# Altium PCB STM32.PcbDoc (part 3 of 10)
Units mil, origin at the board's own origin, x right, y up, seen from the top; angles counter-clockwise.
Board outline 3925 x 3925 mil, 2 copper layers (Top Layer, Bottom Layer); 152 components, 142 nets, 670 pads, 189 vias.
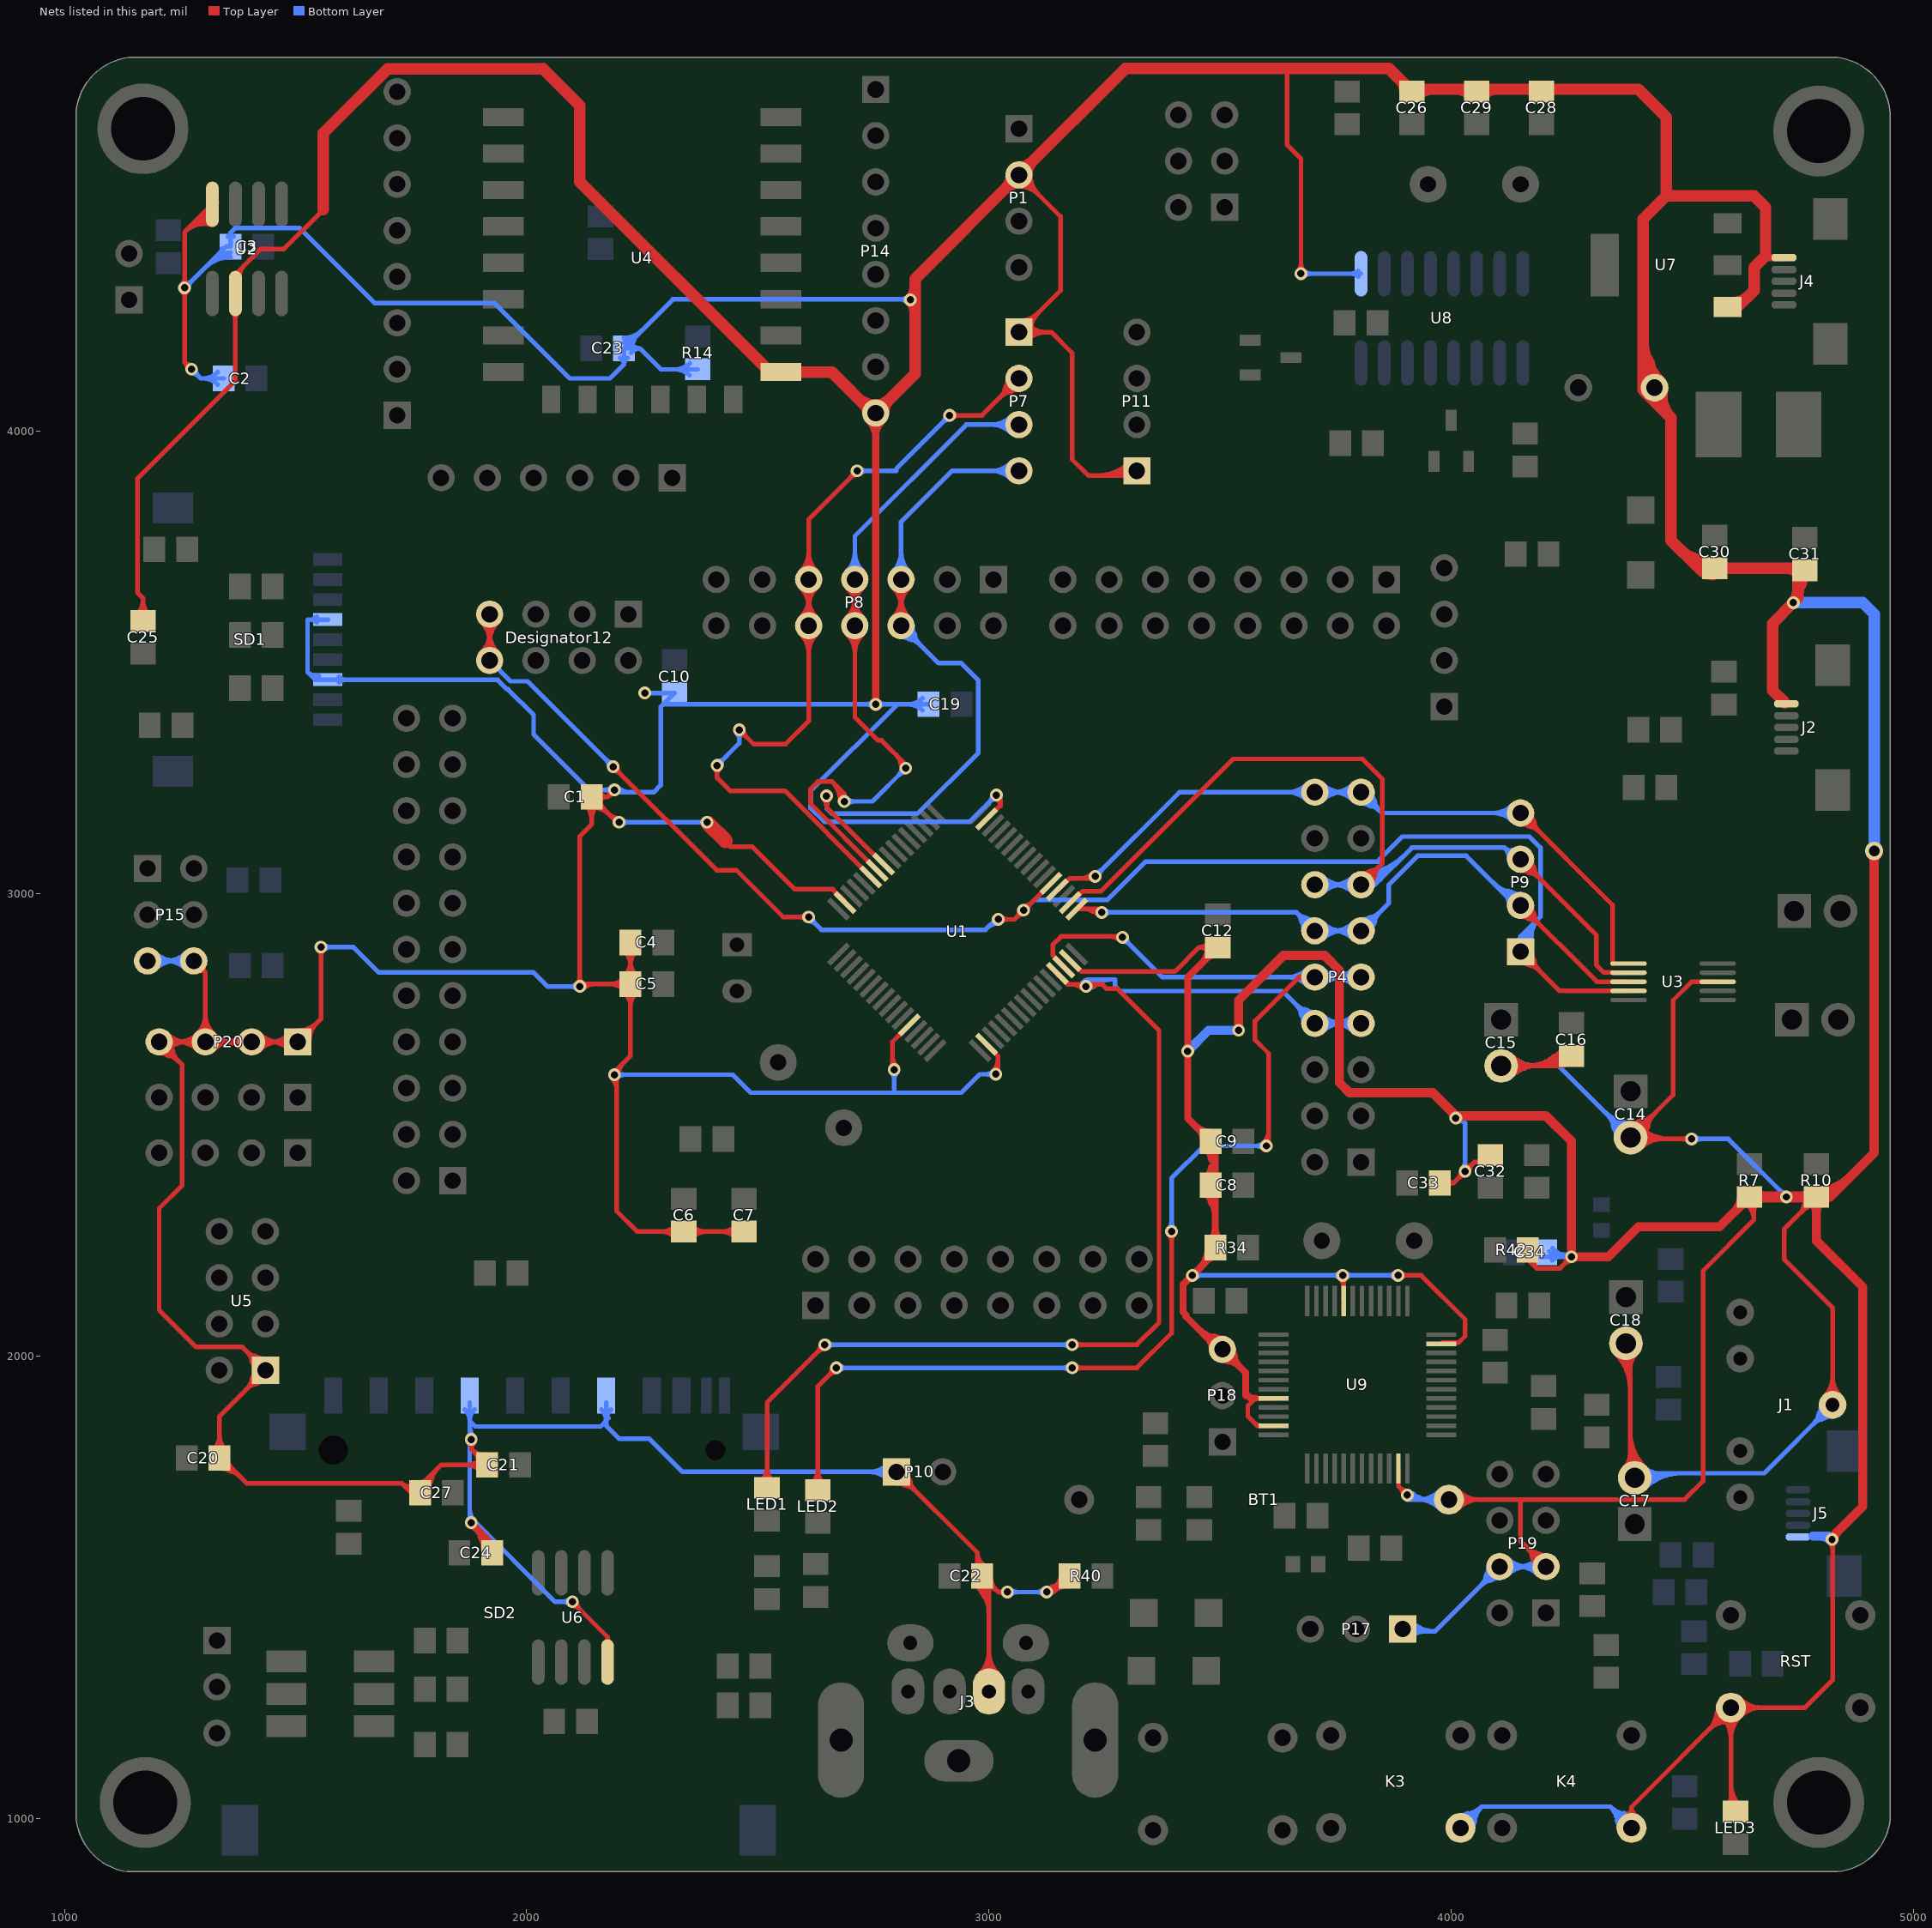
[diagram p3: the nets of this part, all layers, seen from the top]

## Via types
v1: diameter 27.56, hole 15.75, Top Layer to Bottom Layer, tented both sides, 185 vias
v2: diameter 39.37, hole 23.62, Top Layer to Bottom Layer, tented both sides, 3 vias
v3: diameter 39.37, hole 27.56, Top Layer to Bottom Layer, tented both sides, 1 vias

## Nets (pads, with @x,y where several pads share a name; then routed paths per layer and width w, separated by ;. In a path a pad name is that pad's centre, name@x,y a point inside that pad or via, vN(x,y) a via of type N, cw(c..) or ccw(c..) an arc to the next point about the centre after c; other vN are vias at no path point) (continued)
GND: (continued)
  Bottom Layer w10: P15.5@1180,2855 P15.6@1280,2855 ; v1@1260,4319.89 ccw(c1260,4343.78) 1276.89,4326.89 ; v1@1260.56,4310.56 1350,4400 C3.1@1359.57,4400 1359.57,4430.14 ; v1@1268.78,4311.11 cw(c1287.29,4311.11) 1274.2,4324.2 ; v1@1275,4126.22 cw(c1275,4105.02) 1289.99,4120.01 cw(c1304.98,4135) v1@1283.78,4135 ; v1(1275,4135) 1295,4115 C2.2@1344.57,4115 ; 1304.72,4354.72 cw(c1359.57,4299.88) C3.1@1359.57,4377.44 ; 1321.79,4371.79 cw(c1359.57,4334.02) C3.1@1359.57,4387.44 ; C3.1@1337.33,4387.33 ccw(c1328.59,4396.06) C3.1@1340.95,4396.06 ; 1535.65,3473.51 cw(c1533.15,3447.62) SD1.6@1553.23,3464.16 ; v1(1555,2885) 1625,2885 1680,2830 2015,2830 2045,2800 v1(2115,2800) ; v1@1561.21,2878.79 cw(c1576.2,2863.8) 1576.2,2885 cw(c1576.2,2906.2) v1@1561.21,2891.21 ; SD1.3@1570,3593.31 1526,3593.31 1526,3480 ; SD2.3@1876.85,1900 1876.85,1860 ; v1@1878.94,1639.4 ccw(c1901.16,1652) 1894.55,1627.32 ; v1(2099,1469) 2061.63,1469 1876.85,1653.78 1876.85,1860 ; v1@2108.79,2793.79 ccw(c2093.8,2778.8) 2093.8,2800 ccw(c2093.8,2821.2) v1@2108.79,2806.21 ; SD2.6@2172.13,1900 2172.13,1860 ; 2176.73,1866.37 ccw(c2178.83,1860) 2172.13,1860 ; v1@2183.79,3218.79 ccw(c2168.8,3203.8) 2168.8,3225 ccw(c2168.8,3246.2) v1@2183.79,3231.21 ; v1(2190,2609) 2446,2609 2485,2570 2795,2570 ; v1@2190,3220 2275,3220 2290,3235 2290,3404.57 2295.43,3410 ; v1(2190,3225) 2135,3225 2015,3345 2015,3387.14 1959.62,3442.52 1957.76,3442.52 1937.29,3462.99 1902.6,3462.99 1902.21,3463.39 SD1.6@1570,3463.39 1542.61,3463.39 1526,3480 ; v1@2196.21,2602.79 cw(c2211.2,2587.8) 2211.2,2609 cw(c2211.2,2630.2) v1@2196.21,2615.21 ; v1@2196.21,3231.21 ccw(c2223.27,3258.27) 2223.27,3220 ; v1(2200,3155) v1(2390,3155) ; v1@2206.21,3148.79 cw(c2221.2,3133.8) 2221.2,3155 cw(c2221.2,3176.2) v1@2206.21,3161.21 ; C23.2@2210.43,4192.56 ccw(c2210.43,4222.88) C23.2@2231.87,4201.44 ; C23.2@2210.43,4202.56 ccw(c2210.43,4257.02) 2248.94,4218.51 ; C23.2@2225.99,4169.76 cw(c2245,4157.23) 2245,4180 ; C23.2@2225.99,4190.24 ccw(c2245,4202.77) 2245,4180 ; C23.2@2229.06,4183.94 cw(c2264.51,4183.94) 2239.44,4209.01 ; v1(2255.43,3434.57) C10.2@2320,3434.57 2295.43,3410 ; R14.1@2352.9,4121.4 ccw(c2321.11,4089.61) 2321.11,4134.57 ccw(c2321.11,4179.53) R14.1@2352.9,4147.74 ; R14.1@2370,4134.57 2290.43,4134.57 2245,4180 ; v1@2748.79,3403.79 ccw(c2733.8,3388.81) 2733.8,3410 ccw(c2733.8,3431.2) v1@2748.79,3416.21 ; v1@2761.21,3403.79 cw(c2776.2,3388.81) 2776.2,3410 cw(c2776.2,3431.2) v1@2761.21,3416.21 ; v1@2788.79,2613.79 cw(c2773.8,2598.8) 2795,2598.8 cw(c2816.2,2598.8) v1@2801.21,2613.79 ; v1(2795,2620) 2795,2570 ; P10.1@2800,1750 2337,1750 2265,1822 2200,1822 2172.13,1849.87 2172.13,1860 ; 2806.39,4286 cw(c2806.39,4261.39) v1@2823.79,4278.79 ; 2811.22,4286 ccw(c2811.22,4303.78) v1@2823.79,4291.21 ; v1@2820,4286 2316.43,4286 C23.2@2210.43,4180 ; C19.2@2856.4,3396.83 ccw(c2824.61,3365.04) 2824.61,3410 ccw(c2824.61,3454.96) C19.2@2856.4,3423.17 ; C19.2@2869.57,3410 2801.74,3410 ; v1@3007.22,3214 cw(c2986.02,3214) 3001.01,3199.01 cw(c3016,3184.02) v1@3016,3205.22 ; v1@3008.79,2603.79 ccw(c2993.8,2588.8) 2993.8,2610 ccw(c2993.8,2631.2) v1@3008.79,2616.21 ; v1(3015,2610) 2980,2610 2940,2570 2795,2570 ; v1(3016,3214) 2958,3156 2643.74,3156 2613.74,3186 2613.74,3222 2801.74,3410 ; v1@3045,1490 v1(3125,1490) ; v1(3440,2175) v1@3755,2175 ; v1(3675,4341.46) U8.1@3805,4341.46 ; v1@3681.21,4335.25 cw(c3696.2,4320.26) 3696.2,4341.46 cw(c3696.2,4362.65) v1@3681.21,4347.66 ; v1(3765.29,2175) v1(3885,2175) ; U8.1@3798.79,4335.25 ccw(c3783.8,4320.26) 3783.8,4341.46 ccw(c3783.8,4362.65) U8.1@3798.79,4347.66 ; P17.1@3895,1410 3900,1405 3965,1405 ; v1@3904.26,1700.97 cw(c3912.17,1690.53) 3918.72,1701.87 ; v1@3905,1690 BT1.2@3995,1690 ; v1@3910.3,1693 cw(c3922.04,1677.48) 3931.77,1694.33 ; K3.1@4007.87,982.89 cw(c4045.54,973.91) 4036.09,1011.47 ; v1@4015,2520 4030,2505 ; K3.1@4017.59,980.57 cw(c4063.64,969.59) 4052.09,1015.49 ; K3.1@4020,980 4066,1026 ; K3.1@4020.57,977.59 ccw(c4009.59,1023.64) 4055.49,1012.09 ; K3.1@4022.89,967.87 ccw(c4013.91,1005.54) 4051.47,996.09 ; v1(4030,2400) 4030,2505 ; 4074.48,1522.65 cw(c4111.61,1512.7) P19.4@4103.9,1550.36 ; 4082.65,1514.48 ccw(c4072.7,1551.61) P19.4@4110.36,1543.9 ; C15.2@4108,2628 4233,2628 C14.2@4388,2473 ; C34.1@4190.87,2215 v1(4260,2215) ; P19.3@4205,1545 P19.4@4105,1545 3965,1405 ; 4345.38,2514.8 ccw(c4399.53,2529.31) C14.2@4388.28,2474.39 ; 4346.2,2515.62 cw(c4331.69,2461.47) C14.2@4386.61,2472.72 ; 4349.57,2499.17 ccw(c4395.9,2511.58) C14.2@4386.28,2464.59 ; 4354.51,1012.09 ccw(c4400.41,1023.64) K4.1@4389.43,977.59 ; 4357.92,1015.49 cw(c4346.36,969.59) K4.1@4392.41,980.57 ; C14.2@4358.04,2482.46 ccw(c4332.37,2490.56) 4351.44,2509.56 ; C14.2@4358.06,2482.51 ccw(c4332.55,2490.61) 4351.44,2509.56 ; 4358.53,996.09 ccw(c4396.1,1005.54) K4.1@4387.11,967.87 ; 4361.83,2511.43 cw(c4349.42,2465.1) C14.2@4396.41,2474.72 ; 4373.91,1011.47 cw(c4364.46,973.91) K4.1@4402.13,982.89 ; C14.2@4378.49,2502.94 cw(c4370.39,2528.45) 4351.44,2509.56 ; C14.2@4378.54,2502.96 cw(c4370.44,2528.63) 4351.44,2509.56 ; K4.1@4390,980 4344,1026 ; C17.2@4410,1747 4677,1747 J1.1@4825,1895 ; v1(4520,2470) 4599.57,2470 v1(4725,2344.57) ; 4793.65,1871.32 cw(c4831.95,1861.06) J1.1@4824,1899.9 ; 4801.32,1863.66 ccw(c4791.06,1901.95) J1.1@4829.9,1894 ; 1215.07,2855 ccw(c1215.07,2819.93) 1190.27,2844.73 cw(c1215.07,2819.93) 1215.07,2855 ; 1215.07,2855 cw(c1215.07,2890.07) 1190.27,2865.27 ccw(c1215.07,2890.07) 1215.07,2855 ; 1220.79,2855 ccw(c1220.79,2914.21) 1262.66,2872.34 cw(c1220.79,2914.21) 1220.79,2855 ; 1220.79,2855 cw(c1220.79,2795.78) 1262.66,2837.65 ccw(c1220.79,2795.78) 1220.79,2855 ; 1239.21,2855 ccw(c1239.21,2795.78) 1197.34,2837.65 cw(c1239.21,2795.78) 1239.21,2855 ; 1239.21,2855 cw(c1239.21,2914.21) 1197.34,2872.34 ccw(c1239.21,2914.21) 1239.21,2855 ; 1244.93,2855 ccw(c1244.93,2890.07) 1269.73,2865.27 cw(c1244.93,2890.07) 1244.93,2855 ; 1244.93,2855 cw(c1244.93,2819.93) 1269.73,2844.73 ccw(c1244.93,2819.93) 1244.93,2855 ; 1299.61,4115 ccw(c1299.61,4159.96) 1331.4,4128.17 cw(c1299.61,4159.96) 1299.61,4115 ; 1299.61,4115 cw(c1299.61,4070.04) 1331.4,4101.83 ccw(c1299.61,4070.04) 1299.61,4115 ; 1359.57,4430.13 ccw(c1368.68,4430.13) 1365.69,4421.52 cw(c1368.68,4430.13) 1359.57,4430.13 ; 1359.57,4430.13 cw(c1350.45,4430.13) 1353.45,4421.52 ccw(c1350.45,4430.13) 1359.57,4430.13 ; 1359.57,4430.14 1370,4440.57 1508.43,4440.57 1671,4278 1930,4278 2093,4115 2180,4115 2210.43,4145.43 ; 1526,3480 ccw(c1546.14,3500.14) 1550.84,3472.05 cw(c1546.14,3500.14) 1526,3480 ; 1531.09,3593.31 ccw(c1531.09,3614.5) 1546.08,3599.52 cw(c1531.09,3614.5) 1531.09,3593.31 ; 1531.09,3593.31 cw(c1531.09,3572.11) 1546.08,3587.1 ccw(c1531.09,3572.11) 1531.09,3593.31 ; 1608.91,3463.39 ccw(c1608.91,3442.19) 1593.92,3457.18 cw(c1608.91,3442.19) 1608.91,3463.39 ; 1608.91,3463.39 cw(c1608.91,3484.58) 1593.92,3469.59 ccw(c1608.91,3484.58) 1608.91,3463.39 ; 1876.85,1860 ccw(c1841.73,1860) 1866.5,1884.9 cw(c1841.73,1860) 1876.85,1860 ; 1876.85,1860 cw(c1911.97,1860) 1887.2,1884.9 ccw(c1911.97,1860) 1876.85,1860 ; 1876.85,1860 1888.7,1848.15 2160.27,1848.15 2172.13,1860 ; 2077.8,1469 ccw(c2077.8,1490.2) 2092.79,1475.21 cw(c2077.8,1490.2) 2077.8,1469 ; 2077.8,1469 cw(c2077.8,1447.8) 2092.79,1462.79 ccw(c2077.8,1447.8) 2077.8,1469 ; 2172.13,1860 ccw(c2137.01,1860) 2161.77,1884.9 cw(c2137.01,1860) 2172.13,1860 ; 2172.13,1860 cw(c2207.24,1860) 2182.48,1884.9 ccw(c2207.24,1860) 2172.13,1860 ; 2210.43,4145.44 ccw(c2194.56,4145.44) 2201.86,4159.53 cw(c2194.56,4145.44) 2210.43,4145.44 ; 2210.43,4145.44 cw(c2226.31,4145.44) 2219,4159.53 ccw(c2226.31,4145.44) 2210.43,4145.44 ; 2210.43,4145.43 C23.2@2210.43,4180 ; C23.2@2210.43,4180 2245,4180 ; 2295.43,3410 v1(2755,3410) 2801.74,3410 ; 2740.79,1750 ccw(c2740.79,1809.21) 2782.66,1767.34 cw(c2740.79,1809.21) 2740.79,1750 ; 2740.79,1750 cw(c2740.79,1690.79) 2782.66,1732.66 ccw(c2740.79,1690.79) 2740.79,1750 ; 2764.93,1750 ccw(c2764.93,1785.07) 2789.73,1760.27 cw(c2764.93,1785.07) 2764.93,1750 ; 2764.93,1750 cw(c2764.93,1714.93) 2789.73,1739.73 ccw(c2764.93,1714.93) 2764.93,1750 ; 3061.2,1490 ccw(c3061.2,1468.8) 3046.21,1483.79 cw(c3061.2,1468.8) 3061.2,1490 ; 3061.2,1490 cw(c3061.2,1511.2) 3046.21,1496.21 ccw(c3061.2,1511.2) 3061.2,1490 ; 3103.8,1490 ccw(c3103.8,1511.2) 3118.79,1496.21 cw(c3103.8,1511.2) 3103.8,1490 ; 3103.8,1490 cw(c3103.8,1468.8) 3118.79,1483.79 ccw(c3103.8,1468.8) 3103.8,1490 ; 3461.2,2175 ccw(c3461.2,2153.8) 3446.21,2168.79 cw(c3461.2,2153.8) 3461.2,2175 ; 3461.2,2175 cw(c3461.2,2196.2) 3446.21,2181.21 ccw(c3461.2,2196.2) 3461.2,2175 ; 3744.1,2175 ccw(c3744.1,2196.2) 3759.08,2181.21 cw(c3744.1,2196.2) 3744.1,2175 ; 3744.1,2175 cw(c3744.1,2153.8) 3759.08,2168.79 ccw(c3744.1,2153.8) 3744.1,2175 ; 3786.49,2175 ccw(c3786.49,2153.8) 3771.5,2168.79 cw(c3786.49,2153.8) 3786.49,2175 ; 3786.49,2175 cw(c3786.49,2196.2) 3771.5,2181.21 ccw(c3786.49,2196.2) 3786.49,2175 ; 3863.8,2175 ccw(c3863.8,2196.2) 3878.79,2181.21 cw(c3863.8,2196.2) 3863.8,2175 ; 3863.8,2175 cw(c3863.8,2153.8) 3878.79,2168.79 ccw(c3863.8,2153.8) 3863.8,2175 ; 3928.54,1690 ccw(c3928.54,1756.46) 3975.54,1709.46 cw(c3928.54,1756.46) 3928.54,1690 ; 3928.54,1690 cw(c3928.54,1623.54) 3975.54,1670.54 ccw(c3928.54,1623.54) 3928.54,1690 ; 3952.68,1690 ccw(c3952.68,1732.32) 3982.61,1702.39 cw(c3952.68,1732.32) 3952.68,1690 ; 3952.68,1690 cw(c3952.68,1647.68) 3982.61,1677.61 ccw(c3952.68,1647.68) 3952.68,1690 ; 3965,1405 cw(c3965,1478.2) 3912.57,1427.12 ccw(c3965,1478.2) 3965,1405 ; 4030,2421.2 ccw(c4051.2,2421.2) 4036.21,2406.21 cw(c4051.2,2421.2) 4030,2421.2 ; 4030,2421.2 cw(c4008.8,2421.2) 4023.79,2406.21 ccw(c4008.8,2421.2) 4030,2421.2 ; 4030,2505 ccw(c4020.57,2495.57) 4014.19,2507.29 cw(c4020.57,2495.57) 4030,2505 ; 4049.29,1009.29 ccw(c4077.7,980.88) 4037.53,980.27 cw(c4077.7,980.88) 4049.29,1009.29 ; 4049.29,1009.29 cw(c4020.88,1037.7) 4020.27,997.53 ccw(c4020.88,1037.7) 4049.29,1009.29 ; 4063.13,1503.13 ccw(c4021.26,1545) 4080.47,1545 cw(c4021.26,1545) 4063.13,1503.13 ; 4063.13,1503.13 cw(c4105,1461.26) 4105,1520.47 ccw(c4105,1461.26) 4063.13,1503.13 ; 4066,1026 ccw(c4110.62,981.38) 4047.52,980.42 cw(c4110.62,981.38) 4066,1026 ; 4066,1026 cw(c4021.38,1070.62) 4020.42,1007.52 ccw(c4021.38,1070.62) 4066,1026 ; 4066,1026 4344,1026 ; 4080.2,1520.2 ccw(c4055.4,1545) 4090.47,1545 cw(c4055.4,1545) 4080.2,1520.2 ; 4080.2,1520.2 cw(c4105,1495.4) 4105,1530.47 ccw(c4105,1495.4) 4080.2,1520.2 ; 4140.07,1545 ccw(c4140.07,1509.93) 4115.27,1534.73 cw(c4140.07,1509.93) 4140.07,1545 ; 4140.07,1545 cw(c4140.07,1580.07) 4115.27,1555.27 ccw(c4140.07,1580.07) 4140.07,1545 ; 4145.79,1545 ccw(c4145.79,1604.21) 4187.66,1562.34 cw(c4145.79,1604.21) 4145.79,1545 ; 4145.79,1545 cw(c4145.79,1485.79) 4187.66,1527.66 ccw(c4145.79,1485.79) 4145.79,1545 ; 4159.71,2628 ccw(c4159.71,2576.29) 4123.14,2612.86 cw(c4159.71,2576.29) 4159.71,2628 ; 4159.71,2628 cw(c4159.71,2679.71) 4123.14,2643.14 ccw(c4159.71,2679.71) 4159.71,2628 ; 4164.21,1545 ccw(c4164.21,1485.79) 4122.34,1527.66 cw(c4164.21,1485.79) 4164.21,1545 ; 4164.21,1545 cw(c4164.21,1604.21) 4122.34,1562.34 ccw(c4164.21,1604.21) 4164.21,1545 ; 4169.93,1545 ccw(c4169.93,1580.07) 4194.73,1555.27 cw(c4169.93,1580.07) 4169.93,1545 ; 4169.93,1545 cw(c4169.93,1509.93) 4194.73,1534.73 ccw(c4169.93,1509.93) 4169.93,1545 ; 4183.85,2628 ccw(c4183.85,2552.15) 4130.22,2605.78 cw(c4183.85,2552.15) 4183.85,2628 ; 4183.85,2628 cw(c4183.85,2703.85) 4130.22,2650.22 ccw(c4183.85,2703.85) 4183.85,2628 ; 4238.8,2215 ccw(c4238.8,2236.2) 4253.79,2221.21 cw(c4238.8,2236.2) 4238.8,2215 ; 4238.8,2215 cw(c4238.8,2193.8) 4253.79,2208.79 ccw(c4238.8,2193.8) 4238.8,2215 ; 4239.53,2220.49 ccw(c4245.01,2240.96) v1@4255.61,2222.6 ; 4239.53,2220.48 cw(c4234.04,2200.01) v1@4252.4,2210.61 ; 4239.53,2220.49 ccw(c4245.01,2240.96) v1@4255.61,2222.6 ; 4239.53,2220.48 cw(c4234.04,2200.01) v1@4252.4,2210.61 ; 4239.53,2220.49 ccw(c4245.01,2240.96) v1@4255.61,2222.6 ; 4239.53,2220.48 cw(c4234.04,2200.01) v1@4252.4,2210.61 ; v1(4260,2215) cw(c4260,2269.03) 4219.42,2233.36 ccw(c4260,2269.03) v1(4260,2215) ; 4334.37,2526.63 ccw(c4388,2580.27) 4388,2504.42 cw(c4388,2580.27) 4334.37,2526.63 ; 4334.37,2526.63 cw(c4280.73,2473) 4356.58,2473 ccw(c4280.73,2473) 4334.37,2526.63 ; 4344,1026 ccw(c4388.62,1070.62) 4389.58,1007.52 cw(c4388.62,1070.62) 4344,1026 ; 4344,1026 cw(c4299.39,981.38) 4362.48,980.42 ccw(c4299.39,981.38) 4344,1026 ; 4351.44,2509.56 ccw(c4388,2546.12) 4388,2494.42 cw(c4388,2546.12) 4351.44,2509.56 ; 4351.44,2509.56 cw(c4314.88,2473) 4366.58,2473 ccw(c4314.88,2473) 4351.44,2509.56 ; 4360.71,1009.29 ccw(c4389.12,1037.7) 4389.73,997.53 cw(c4389.12,1037.7) 4360.71,1009.29 ; 4360.71,1009.29 cw(c4332.3,980.88) 4372.48,980.27 ccw(c4332.3,980.88) 4360.71,1009.29 ; 4448.71,1747 ccw(c4448.71,1685.29) 4405.07,1728.93 cw(c4448.71,1685.29) 4448.71,1747 ; 4448.71,1747 cw(c4448.71,1788.71) 4419.22,1759.22 ccw(c4448.71,1788.71) 4448.71,1747 ; 4541.2,2470 ccw(c4541.2,2448.8) 4526.21,2463.79 cw(c4541.2,2448.8) 4541.2,2470 ; 4541.2,2470 cw(c4541.2,2491.2) 4526.21,2476.21 ccw(c4541.2,2491.2) 4541.2,2470 ; 4710.01,2359.56 ccw(c4725,2374.54) 4725,2353.35 cw(c4725,2374.54) 4710.01,2359.56 ; 4710.01,2359.56 cw(c4695.02,2344.57) 4716.22,2344.57 ccw(c4695.02,2344.57) 4710.01,2359.56 ; 4782.32,1852.32 ccw(c4739.64,1895) 4800,1895 cw(c4739.64,1895) 4782.32,1852.32 ; 4782.32,1852.32 cw(c4825,1809.65) 4825,1870 ccw(c4825,1809.65) 4782.32,1852.32 ; 4799.39,1869.4 ccw(c4773.79,1895) 4810,1895 cw(c4773.79,1895) 4799.39,1869.4 ; 4799.39,1869.4 cw(c4825,1843.79) 4825,1880 ccw(c4825,1843.79) 4799.39,1869.4 ; v1@1873.79,1646.21 ccw(c1866.41,1653.59) 1876.85,1653.59 cw(c1866.41,1653.59) v1@1873.79,1646.21 ; v1@1873.79,1813.79 cw(c1866.41,1806.41) 1876.85,1806.41 ccw(c1866.41,1806.41) v1@1873.79,1813.79 ; v1@1873.79,1826.21 ccw(c1866.41,1833.59) 1876.85,1833.59 cw(c1866.41,1833.59) v1@1873.79,1826.21 ; 1876.85,1668.8 ccw(c1908.8,1668.8) 1886.21,1646.21 cw(c1908.8,1668.8) 1876.85,1668.8 ; 1876.85,1791.2 cw(c1908.8,1791.2) 1886.21,1813.79 ccw(c1908.8,1791.2) 1876.85,1791.2 ; 1876.85,1848.8 ccw(c1908.8,1848.8) 1886.21,1826.21 cw(c1908.8,1848.8) 1876.85,1848.8 ; v1@1880,1631.22 cw(c1880,1584.36) 1913.14,1617.49 ccw(c1880,1584.36) v1@1880,1631.22 ; v1@1880,1641.22 cw(c1880,1618.5) 1896.07,1634.57 ccw(c1880,1618.5) v1@1880,1641.22 ; v1@3904.14,1699.14 ccw(c3926.2,1721.2) 3926.2,1690 cw(c3926.2,1721.2) v1@3904.14,1699.14 ; P17.1@3905.41,1420.14 ccw(c3941.29,1455.1) 3941.29,1405 cw(c3941.29,1455.1) P17.1@3905.41,1420.14 ; v1@3911.21,1706.21 ccw(c3950.34,1745.34) 3950.34,1690 cw(c3950.34,1745.34) v1@3911.21,1706.21 ; P17.1@3912.34,1392.66 cw(c3942.14,1362.86) 3942.14,1405 ccw(c3942.14,1362.86) P17.1@3912.34,1392.66 ; C34.1@4211.91,2226.76 ccw(c4237.89,2249.6) 4237.89,2215 cw(c4237.89,2249.6) C34.1@4211.91,2226.76 ; C34.1@4218.6,2207.9 cw(c4235.75,2190.74) 4235.75,2215 ccw(c4235.75,2190.74) C34.1@4218.6,2207.9 ; C17.2@4412.14,1721.86 cw(c4472.85,1661.15) 4472.85,1747 ccw(c4472.85,1661.15) C17.2@4412.14,1721.86 ; C17.2@4419.22,1714.78 cw(c4496.99,1637.01) 4496.99,1747 ccw(c4496.99,1637.01) C17.2@4419.22,1714.78
  Bottom Layer w20: v1(3430,2660) 3475,2705 v1(3540,2705) ; 4782.63,1610.89 4816.75,1610.89 v1(4823.82,1603.82) ; 4797.62,1610.89 cw(c4797.62,1577.62) v1@4821.15,1601.15
  Bottom Layer w25: v1(4740,3630) 4890,3630 4915,3605 v2(4915,3092.99)
  other v1: 1880,1640 1880,1820 4010,2515 2830,4285
"I2C SCL": P7.3 P8.7 P8.8 U1.58 | length 3428.4
  Top Layer w10: v1@2681.02,3206.43 ccw(c2674.2,3213.76) 2683.88,3216.33 ccw(c2696.56,3219.71) v1@2690.83,3207.9 ; v1(2687,3200) 2687,3216.46 ; P8.7@2710,3680 P8.8@2710,3580 2710,3382 2760,3332 2768,3332 2820,3280 v1(2820,3272) ; U1.58@2758.52,3050.95 2614,3195.47 2614,3227 2630,3243 2660.46,3243 ; 2807.68,3285.21 ccw(c2829.3,3291.01) v1@2819.46,3270.9 ; 2660.46,3243 cw(c2617.6,3200.13) 2678.22,3200.02 ccw(c2617.6,3200.13) 2660.46,3243 ; 2660.46,3243 2687,3216.46 ; 2687,3216.46 ccw(c2698.04,3216.46) 2691.89,3207.29 cw(c2698.04,3216.46) 2687,3216.46 ; 2687,3216.46 cw(c2675.96,3216.46) 2682.11,3207.29 ccw(c2675.96,3216.46) 2687,3216.46 ; 2710,3520.79 ccw(c2650.79,3520.79) 2692.66,3562.66 cw(c2650.79,3520.79) 2710,3520.79 ; 2710,3520.79 cw(c2769.21,3520.79) 2727.34,3562.66 ccw(c2769.21,3520.79) 2710,3520.79 ; 2710,3544.93 ccw(c2674.93,3544.93) 2699.73,3569.73 cw(c2674.93,3544.93) 2710,3544.93 ; 2710,3544.93 cw(c2745.07,3544.93) 2720.27,3569.73 ccw(c2745.07,3544.93) 2710,3544.93 ; 2710,3615.07 ccw(c2745.07,3615.07) 2720.27,3590.27 cw(c2745.07,3615.07) 2710,3615.07 ; 2710,3615.07 cw(c2674.93,3615.07) 2699.73,3590.27 ccw(c2674.93,3615.07) 2710,3615.07 ; 2710,3620.79 ccw(c2650.79,3620.79) 2692.66,3662.66 cw(c2650.79,3620.79) 2710,3620.79 ; 2710,3620.79 cw(c2769.21,3620.79) 2727.34,3662.66 ccw(c2769.21,3620.79) 2710,3620.79 ; 2710,3639.21 ccw(c2769.21,3639.21) 2727.34,3597.34 cw(c2769.21,3639.21) 2710,3639.21 ; 2710,3639.21 cw(c2650.79,3639.21) 2692.66,3597.34 ccw(c2650.79,3639.21) 2710,3639.21 ; 2710,3644.93 ccw(c2674.93,3644.93) 2699.73,3669.73 cw(c2674.93,3644.93) 2710,3644.93 ; 2710,3644.93 cw(c2745.07,3644.93) 2720.27,3669.73 ccw(c2745.07,3644.93) 2710,3644.93 ; 2677.49,3225.97 cw(c2651.58,3200.07) 2688.22,3200 ccw(c2651.58,3200.07) 2677.49,3225.97 ; 2799.36,3300.64 cw(c2770.71,3272) 2811.22,3272 ccw(c2770.71,3272) 2799.36,3300.64
  Bottom Layer w10: v1(2687,3200) 2748,3200 v1(2820,3272) ; P8.7@2710,3680 2710,3774 2951,4015 P7.3@3065,4015 ; 2708.2,3200 ccw(c2708.2,3178.8) 2693.21,3193.79 cw(c2708.2,3178.8) 2708.2,3200 ; 2708.2,3200 cw(c2708.2,3221.2) 2693.21,3206.21 ccw(c2708.2,3221.2) 2708.2,3200 ; 2710,3715.07 ccw(c2745.07,3715.07) 2720.27,3690.27 cw(c2745.07,3715.07) 2710,3715.07 ; 2710,3715.07 cw(c2674.93,3715.07) 2699.73,3690.27 ccw(c2674.93,3715.07) 2710,3715.07 ; 2710,3739.21 ccw(c2769.21,3739.21) 2727.34,3697.34 cw(c2769.21,3739.21) 2710,3739.21 ; 2710,3739.21 cw(c2650.79,3739.21) 2692.66,3697.34 ccw(c2650.79,3739.21) 2710,3739.21 ; 2805.01,3257.01 ccw(c2790.02,3272) 2811.22,3272 cw(c2790.02,3272) 2805.01,3257.01 ; 2805.01,3257.01 cw(c2820,3242.02) 2820,3263.22 ccw(c2820,3242.02) 2805.01,3257.01 ; 3005.79,4015 ccw(c3005.79,4074.21) 3047.66,4032.34 cw(c3005.79,4074.21) 3005.79,4015 ; 3005.79,4015 cw(c3005.79,3955.78) 3047.66,3997.65 ccw(c3005.79,3955.78) 3005.79,4015 ; 3029.93,4015 ccw(c3029.93,4050.07) 3054.73,4025.27 cw(c3029.93,4050.07) 3029.93,4015 ; 3029.93,4015 cw(c3029.93,3979.93) 3054.73,4004.73 ccw(c3029.93,3979.93) 3029.93,4015
"I2C SDA": P7.2 P8.9 P8.10 U1.59 | length 3911.4
  Top Layer w10: v1(2412,3278) 2412,3251 2440,3223 2558.63,3223 U1.59@2744.6,3037.03 ; v1@2458.8,3354.76 ccw(c2472.87,3357.64) 2469.15,3343.77 ; v1(2460,3355) 2491,3324 2560,3324 2610,3374 P8.10@2610,3580 P8.9@2610,3680 2610,3810 v1(2715,3915) ; v1@2460.24,3356.2 cw(c2457.36,3342.13) 2471.23,3345.85 ; 2703.77,3905.85 cw(c2717.64,3902.13) v1@2714.76,3916.2 ; 2705.85,3903.77 ccw(c2702.13,3917.64) v1@2716.2,3914.76 ; v1(2915,4035) 2985,4035 P7.2@3065,4115 ; 3034.48,4092.65 cw(c3071.61,4082.7) P7.2@3063.9,4120.36 ; 3042.65,4084.48 ccw(c3032.7,4121.61) P7.2@3070.36,4113.9 ; 2412,3256.8 ccw(c2390.8,3256.8) 2405.79,3271.79 cw(c2390.8,3256.8) 2412,3256.8 ; 2412,3256.8 cw(c2433.2,3256.8) 2418.21,3271.79 ccw(c2433.2,3256.8) 2412,3256.8 ; 2474.99,3340.01 ccw(c2460,3325.02) 2460,3346.22 cw(c2460,3325.02) 2474.99,3340.01 ; 2474.99,3340.01 cw(c2489.98,3355) 2468.78,3355 ccw(c2489.98,3355) 2474.99,3340.01 ; 2610,3520.79 ccw(c2550.79,3520.79) 2592.66,3562.66 cw(c2550.79,3520.79) 2610,3520.79 ; 2610,3520.79 cw(c2669.21,3520.79) 2627.34,3562.66 ccw(c2669.21,3520.79) 2610,3520.79 ; 2610,3544.93 ccw(c2574.93,3544.93) 2599.73,3569.73 cw(c2574.93,3544.93) 2610,3544.93 ; 2610,3544.93 cw(c2645.07,3544.93) 2620.27,3569.73 ccw(c2645.07,3544.93) 2610,3544.93 ; 2610,3615.07 ccw(c2645.07,3615.07) 2620.27,3590.27 cw(c2645.07,3615.07) 2610,3615.07 ; 2610,3615.07 cw(c2574.93,3615.07) 2599.73,3590.27 ccw(c2574.93,3615.07) 2610,3615.07 ; 2610,3620.79 ccw(c2550.79,3620.79) 2592.66,3662.66 cw(c2550.79,3620.79) 2610,3620.79 ; 2610,3620.79 cw(c2669.21,3620.79) 2627.34,3662.66 ccw(c2669.21,3620.79) 2610,3620.79 ; 2610,3639.21 ccw(c2669.21,3639.21) 2627.34,3597.34 cw(c2669.21,3639.21) 2610,3639.21 ; 2610,3639.21 cw(c2550.79,3639.21) 2592.66,3597.34 ccw(c2550.79,3639.21) 2610,3639.21 ; 2610,3644.93 ccw(c2574.93,3644.93) 2599.73,3669.73 cw(c2574.93,3644.93) 2610,3644.93 ; 2610,3644.93 cw(c2645.07,3644.93) 2620.27,3669.73 ccw(c2645.07,3644.93) 2610,3644.93 ; 2610,3715.07 ccw(c2645.07,3715.07) 2620.27,3690.27 cw(c2645.07,3715.07) 2610,3715.07 ; 2610,3715.07 cw(c2574.93,3715.07) 2599.73,3690.27 ccw(c2574.93,3715.07) 2610,3715.07 ; 2610,3739.21 ccw(c2669.21,3739.21) 2627.34,3697.34 cw(c2669.21,3739.21) 2610,3739.21 ; 2610,3739.21 cw(c2550.79,3739.21) 2592.66,3697.34 ccw(c2550.79,3739.21) 2610,3739.21 ; 2700.01,3900.01 ccw(c2685.02,3915) 2706.22,3915 cw(c2685.02,3915) 2700.01,3900.01 ; 2700.01,3900.01 cw(c2715,3885.02) 2715,3906.22 ccw(c2715,3885.02) 2700.01,3900.01 ; 2936.2,4035 ccw(c2936.2,4013.8) 2921.21,4028.79 cw(c2936.2,4013.8) 2936.2,4035 ; 2936.2,4035 cw(c2936.2,4056.2) 2921.21,4041.21 ccw(c2936.2,4056.2) 2936.2,4035 ; 3023.13,4073.13 ccw(c2981.26,4115) 3040.47,4115 cw(c2981.26,4115) 3023.13,4073.13 ; 3023.13,4073.13 cw(c3065,4031.26) 3065,4090.47 ccw(c3065,4031.26) 3023.13,4073.13 ; 3040.2,4090.2 ccw(c3015.4,4115) 3050.47,4115 cw(c3015.4,4115) 3040.2,4090.2 ; 3040.2,4090.2 cw(c3065,4065.4) 3065,4100.47 ccw(c3065,4065.4) 3040.2,4090.2
  Bottom Layer w10: v1(2412,3278) 2460,3326 2460,3345 v1(2460,3355) ; v1(2715,3915) 2800,3915 2800,3920 v1(2915,4035) ; 2426.99,3292.99 ccw(c2441.98,3278) 2420.78,3278 cw(c2441.98,3278) 2426.99,3292.99 ; 2426.99,3292.99 cw(c2412,3307.98) 2412,3286.78 ccw(c2412,3307.98) 2426.99,3292.99 ; 2460,3333.8 ccw(c2438.8,3333.8) 2453.79,3348.79 cw(c2438.8,3333.8) 2460,3333.8 ; 2460,3333.8 cw(c2481.2,3333.8) 2466.21,3348.79 ccw(c2481.2,3333.8) 2460,3333.8 ; 2736.2,3915 ccw(c2736.2,3893.8) 2721.21,3908.79 cw(c2736.2,3893.8) 2736.2,3915 ; 2736.2,3915 cw(c2736.2,3936.2) 2721.21,3921.21 ccw(c2736.2,3936.2) 2736.2,3915 ; 2900.01,4020.01 ccw(c2885.02,4035) 2906.22,4035 cw(c2885.02,4035) 2900.01,4020.01 ; 2900.01,4020.01 cw(c2915,4005.02) 2915,4026.22 ccw(c2915,4005.02) 2900.01,4020.01
"I2C SMBA": P7.4 P8.5 P8.6 U1.57 | length 3211.3
  Top Layer w10: v1(2648.78,3212) 2648.78,3187.08 2770.99,3064.87 U1.57@2772.44,3064.87 ; P8.6@2810,3580 P8.5@2810,3680 ; 2648.78,3190.8 ccw(c2627.58,3190.8) 2642.57,3205.79 cw(c2627.58,3190.8) 2648.78,3190.8 ; 2648.78,3190.8 cw(c2669.97,3190.8) 2654.99,3205.79 ccw(c2669.97,3190.8) 2648.78,3190.8 ; 2810,3615.07 ccw(c2845.07,3615.07) 2820.27,3590.27 cw(c2845.07,3615.07) 2810,3615.07 ; 2810,3615.07 cw(c2774.93,3615.07) 2799.73,3590.27 ccw(c2774.93,3615.07) 2810,3615.07 ; 2810,3620.79 ccw(c2750.79,3620.79) 2792.66,3662.66 cw(c2750.79,3620.79) 2810,3620.79 ; 2810,3620.79 cw(c2869.21,3620.79) 2827.34,3662.66 ccw(c2869.21,3620.79) 2810,3620.79 ; 2810,3639.21 ccw(c2869.21,3639.21) 2827.34,3597.34 cw(c2869.21,3639.21) 2810,3639.21 ; 2810,3639.21 cw(c2750.79,3639.21) 2792.66,3597.34 ccw(c2750.79,3639.21) 2810,3639.21 ; 2810,3644.93 ccw(c2774.93,3644.93) 2799.73,3669.73 cw(c2774.93,3644.93) 2810,3644.93 ; 2810,3644.93 cw(c2845.07,3644.93) 2820.27,3669.73 ccw(c2845.07,3644.93) 2810,3644.93
  Bottom Layer w10: v1(2648.78,3212) 2648.78,3184.88 2660,3173.66 2845.57,3173.66 2977,3305.09 2977,3462 2940,3499 2891,3499 P8.6@2810,3580 ; P8.6@2804.64,3578.9 ccw(c2842.3,3586.61) 2832.35,3549.48 ; P8.5@2810,3680 2810,3805 2920,3915 P7.4@3065,3915 ; P8.6@2811.1,3585.36 cw(c2803.39,3547.7) 2840.52,3557.65 ; 2648.78,3190.8 ccw(c2627.58,3190.8) 2642.57,3205.79 cw(c2627.58,3190.8) 2648.78,3190.8 ; 2648.78,3190.8 cw(c2669.97,3190.8) 2654.99,3205.79 ccw(c2669.97,3190.8) 2648.78,3190.8 ; 2810,3715.07 ccw(c2845.07,3715.07) 2820.27,3690.27 cw(c2845.07,3715.07) 2810,3715.07 ; 2810,3715.07 cw(c2774.93,3715.07) 2799.73,3690.27 ccw(c2774.93,3715.07) 2810,3715.07 ; 2810,3739.21 ccw(c2869.21,3739.21) 2827.34,3697.34 cw(c2869.21,3739.21) 2810,3739.21 ; 2810,3739.21 cw(c2750.79,3739.21) 2792.66,3697.34 ccw(c2750.79,3739.21) 2810,3739.21 ; 2834.8,3555.2 ccw(c2810,3530.4) 2810,3565.47 cw(c2810,3530.4) 2834.8,3555.2 ; 2834.8,3555.2 cw(c2859.6,3580) 2824.53,3580 ccw(c2859.6,3580) 2834.8,3555.2 ; 2851.87,3538.13 ccw(c2810,3496.26) 2810,3555.47 cw(c2810,3496.26) 2851.87,3538.13 ; 2851.87,3538.13 cw(c2893.74,3580) 2834.53,3580 ccw(c2893.74,3580) 2851.87,3538.13 ; 3005.79,3915 ccw(c3005.79,3974.21) 3047.66,3932.34 cw(c3005.79,3974.21) 3005.79,3915 ; 3005.79,3915 cw(c3005.79,3855.78) 3047.66,3897.65 ccw(c3005.79,3855.78) 3005.79,3915 ; 3029.93,3915 ccw(c3029.93,3950.07) 3054.73,3925.27 cw(c3029.93,3950.07) 3029.93,3915 ; 3029.93,3915 cw(c3029.93,3879.93) 3054.73,3904.73 ccw(c3029.93,3879.93) 3029.93,3915
"I2S CK": P4.13 P4.14 P9.3 U1.34 U3.2 | length 4189.1
  Top Layer w10: U1.34@3176.1,2981.36 3177.8,2981.36 3201.82,3005.37 3241.63,3005.37 3528.13,3291.87 3808.13,3291.87 3851.26,3248.74 3851.26,3066.26 P4.13@3805,3020 ; P4.13@3799.64,3021.1 cw(c3837.3,3013.39) 3827.35,3050.52 ; P4.13@3806.1,3014.64 ccw(c3798.39,3052.3) 3835.52,3042.35 ; P9.3@4144.64,3073.9 ccw(c4182.3,3081.61) 4172.35,3044.48 ; P9.3@4150,3075 4314,2911 4314,2846 4330,2830 4349.68,2830 U3.2@4350,2829.68 ; P9.3@4151.1,3080.36 cw(c4143.39,3042.7) 4180.52,3052.65 ; 3829.8,3044.8 ccw(c3854.6,3020) 3819.53,3020 cw(c3854.6,3020) 3829.8,3044.8 ; 3829.8,3044.8 cw(c3805,3069.6) 3805,3034.53 ccw(c3805,3069.6) 3829.8,3044.8 ; 3846.87,3061.87 ccw(c3888.74,3020) 3829.53,3020 cw(c3888.74,3020) 3846.87,3061.87 ; 3846.87,3061.87 cw(c3805,3103.74) 3805,3044.53 ccw(c3805,3103.74) 3846.87,3061.87 ; 4174.8,3050.2 ccw(c4150,3025.4) 4150,3060.47 cw(c4150,3025.4) 4174.8,3050.2 ; 4174.8,3050.2 cw(c4199.6,3075) 4164.53,3075 ccw(c4199.6,3075) 4174.8,3050.2 ; 4191.87,3033.13 ccw(c4150,2991.26) 4150,3050.47 cw(c4150,2991.26) 4191.87,3033.13 ; 4191.87,3033.13 cw(c4233.74,3075) 4174.53,3075 ccw(c4233.74,3075) 4191.87,3033.13
  Bottom Layer w10: P4.14@3705,3020 P4.13@3805,3020 3835,3020 ; P4.13@3809.09,3018.05 cw(c3852.83,2997.15) 3840.29,3043.98 ; P4.13@3817.26,3041.24 ccw(c3839.41,3079.59) 3850.87,3036.82 ; P4.13@3818.11,3013.74 cw(c3878.61,2984.84) 3861.25,3049.6 ; P4.13@3818.91,3015.81 cw(c3843.22,3008.48) 3836.65,3033.01 ; P9.3@4140,3075 4115,3100 ; P9.3@4145,3070 P9.3@4150,3075 ; 3740.07,3020 ccw(c3740.07,2984.93) 3715.27,3009.73 cw(c3740.07,2984.93) 3740.07,3020 ; 3740.07,3020 cw(c3740.07,3055.07) 3715.27,3030.27 ccw(c3740.07,3055.07) 3740.07,3020 ; 3745.79,3020 ccw(c3745.79,3079.21) 3787.66,3037.34 cw(c3745.79,3079.21) 3745.79,3020 ; 3745.79,3020 cw(c3745.79,2960.79) 3787.66,3002.66 ccw(c3745.79,2960.79) 3745.79,3020 ; 3764.21,3020 ccw(c3764.21,2960.79) 3722.34,3002.66 cw(c3764.21,2960.79) 3764.21,3020 ; 3764.21,3020 cw(c3764.21,3079.21) 3722.34,3037.34 ccw(c3764.21,3079.21) 3764.21,3020 ; 3769.93,3020 ccw(c3769.93,3055.07) 3794.73,3030.27 cw(c3769.93,3055.07) 3769.93,3020 ; 3769.93,3020 cw(c3769.93,2984.93) 3794.73,3009.73 ccw(c3769.93,2984.93) 3769.93,3020 ; 3835,3020 ccw(c3835,3013.92) 3829.04,3015.13 cw(c3835,3013.92) 3835,3020 ; 3835,3020 cw(c3835,3026.08) 3829.04,3024.87 ccw(c3835,3026.08) 3835,3020 ; 3835,3020 3915,3100 4115,3100 ; 4115,3100 ccw(c4128.97,3113.97) 4138.35,3096.58 cw(c4128.97,3113.97) 4115,3100 ; P4.13@3805,3014.53 ccw(c3805,3073.74) 3846.87,3031.87 cw(c3805,3073.74) P4.13@3805,3014.53 ; P4.13@3805,3024.53 ccw(c3805,3107.88) 3863.94,3048.94 cw(c3805,3107.88) P4.13@3805,3024.53 ; P4.13@3805,3034.53 ccw(c3805,3142.03) 3881.01,3066.01 cw(c3805,3142.03) P4.13@3805,3034.53 ; P4.13@3805,3044.53 ccw(c3805,3176.17) 3898.08,3083.08 cw(c3805,3176.17) P4.13@3805,3044.53 ; 4115.2,3099.8 cw(c4090.4,3075) 4125.47,3075 ccw(c4090.4,3075) 4115.2,3099.8 ; 4124.49,3090.51 ccw(c4135.62,3101.63) 4143.1,3087.78 cw(c4135.62,3101.63) 4124.49,3090.51
"I2S MCK": Designator12.7 Designator12.8 P9.1 U1.37 U3.4 | length 4894.8
  Top Layer w10: Designator12.8@1902.66,3522.34 ccw(c1860.79,3564.21) 1920,3564.21 ccw(c1979.21,3564.21) Designator12.8@1937.34,3522.34 ; Designator12.7@1902.66,3587.66 cw(c1860.79,3545.79) 1920,3545.79 cw(c1979.21,3545.79) Designator12.7@1937.34,3587.66 ; Designator12.8@1909.73,3515.27 ccw(c1884.93,3540.07) 1920,3540.07 ccw(c1955.07,3540.07) Designator12.8@1930.27,3515.27 ; Designator12.7@1909.73,3594.73 cw(c1884.93,3569.93) 1920,3569.93 cw(c1955.07,3569.93) Designator12.7@1930.27,3594.73 ; Designator12.8@1920,3505 Designator12.7@1920,3605 ; v1@2187.14,3266.22 cw(c2187.14,3245.02) 2202.12,3260.01 cw(c2217.11,3275) v1@2195.92,3275 ; v1(2187.14,3275) 2410.88,3051.26 2453.46,3051.26 2554.72,2950 v1(2610,2950) ; v1@2603.79,2943.79 ccw(c2588.8,2928.8) 2588.8,2950 ccw(c2588.8,2971.2) v1@2603.79,2956.21 ; v1@3015,2945 3055,2945 v1(3075,2965) ; v1@3026.21,2938.79 cw(c3041.2,2923.8) 3041.2,2945 cw(c3041.2,2966.2) v1@3026.21,2951.21 ; v1@3066.22,2965 cw(c3045.02,2965) 3060.01,2950.01 cw(c3075,2935.02) v1@3075,2956.22 ; v1@3074,2962.77 U1.37@3134.34,3023.11 ; v1@3075,2973.78 ccw(c3075,2997.94) 3092.08,2980.86 ; v1@3083.78,2965 cw(c3102.01,2965) 3089.12,2977.89 ; P9.1@4144.64,2873.9 ccw(c4182.3,2881.61) 4172.35,2844.48 ; P9.1@4150,2875 4234.69,2790.31 U3.4@4383.54,2790.31 ; P9.1@4151.1,2880.36 cw(c4143.39,2842.7) 4180.52,2852.65 ; P9.1@4174.8,2850.2 ccw(c4150,2825.4) 4150,2860.47 cw(c4150,2825.4) P9.1@4174.8,2850.2 ; P9.1@4174.8,2850.2 cw(c4199.6,2875) 4164.53,2875 ccw(c4199.6,2875) P9.1@4174.8,2850.2 ; 4191.87,2833.13 ccw(c4150,2791.26) 4150,2850.47 cw(c4150,2791.26) 4191.87,2833.13 ; 4191.87,2833.13 cw(c4233.74,2875) 4174.53,2875 ccw(c4233.74,2875) 4191.87,2833.13
  Bottom Layer w10: Designator12.8@1920,3505 1965,3460 2002.14,3460 v1(2187.14,3275) ; v1@2178.36,3275 ccw(c2157.16,3275) 2172.15,3289.99 ccw(c2187.14,3304.98) v1@2187.14,3283.78 ; v1@2610,2941.22 cw(c2610,2920.02) 2624.99,2935.01 cw(c2639.98,2950) v1@2618.78,2950 ; v1(2610,2950) 2637.52,2922.48 2992.48,2922.48 v1@3015,2945 ; 2996.48,2926.48 cw(c3020,2902.95) v1@3020,2936.22 ; v1@3074,2962.77 3098.23,2987 3256,2987 3339,3070 3845,3070 3845,3075 3894,3124 4169,3124 4193,3100 4193,2951 ; v1@3075,2973.78 ccw(c3075,2997.94) 3092.08,2980.86 ; v1@3083.78,2965 cw(c3102.01,2965) 3089.12,2977.89 ; P9.1@4150,2875 4150,2908 ; P9.1@4153.82,2871.08 ccw(c4106.58,2919.55) 4174.25,2918.68 ; P9.1@4160.8,2863.92 ccw(c4130.41,2895.1) P9.1@4173.94,2894.54 ; 4150,2908 ccw(c4159.93,2908) 4157.07,2898.49 cw(c4159.93,2908) 4150,2908 ; 4150,2908 cw(c4140.07,2908) 4142.93,2898.49 ccw(c4140.07,2908) 4150,2908 ; 4150,2908 4193,2951 ; 4193,2951 ccw(c4244.88,2899.12) 4173.77,2881.04 cw(c4244.88,2899.12) 4193,2951 ; P9.1@4144.7,2873.65 cw(c4185.41,2884) 4155.7,2913.7 ccw(c4185.41,2884) P9.1@4144.7,2873.65 ; P9.1@4154.39,2876.12 cw(c4205.23,2889.04) 4168.14,2926.14 ccw(c4205.23,2889.04) P9.1@4154.39,2876.12 ; P9.1@4164.08,2878.58 cw(c4225.05,2894.08) 4180.57,2938.57 ccw(c4225.05,2894.08) P9.1@4164.08,2878.58
  other v1: 3020,2945
"I2S SD": P4.17 P4.18 P9.4 U1.36 U3.1 | length 3715.4
  Top Layer w10: U1.36@3148.26,3009.19 3149.96,3009.19 3173.98,3033.21 3225.21,3033.21 v1(3230,3038) ; P9.4@4144.64,3173.9 ccw(c4182.3,3181.61) 4172.35,3144.48 ; P9.4@4150,3175 4349,2976 ; P9.4@4151.1,3180.36 cw(c4143.39,3142.7) 4180.52,3152.65 ; 4174.8,3150.2 ccw(c4150,3125.4) 4150,3160.47 cw(c4150,3125.4) 4174.8,3150.2 ; 4174.8,3150.2 cw(c4199.6,3175) 4164.53,3175 ccw(c4199.6,3175) 4174.8,3150.2 ; 4191.87,3133.13 ccw(c4150,3091.26) 4150,3150.47 cw(c4150,3091.26) 4191.87,3133.13 ; 4191.87,3133.13 cw(c4233.74,3175) 4174.53,3175 ccw(c4233.74,3175) 4191.87,3133.13 ; 4349,2976 4349,2849.37 4349,2976 ; 3197.25,3033.21 ccw(c3197.25,3070.75) 3223.79,3044.21 cw(c3197.25,3070.75) 3197.25,3033.21
  Bottom Layer w10: v1(3230,3038) 3412,3220 P4.18@3705,3220 P4.17@3805,3220 3850,3175 P9.4@4150,3175 ; P4.17@3799.64,3218.9 ccw(c3837.3,3226.61) 3827.35,3189.48 ; P4.17@3806.1,3225.36 cw(c3798.39,3187.7) 3835.52,3197.65 ; 3244.99,3052.99 ccw(c3259.98,3038) 3238.78,3038 cw(c3259.98,3038) 3244.99,3052.99 ; 3244.99,3052.99 cw(c3230,3067.98) 3230,3046.78 ccw(c3230,3067.98) 3244.99,3052.99 ; 3645.79,3220 ccw(c3645.79,3279.21) 3687.66,3237.34 cw(c3645.79,3279.21) 3645.79,3220 ; 3645.79,3220 cw(c3645.79,3160.79) 3687.66,3202.66 ccw(c3645.79,3160.79) 3645.79,3220 ; 3669.93,3220 ccw(c3669.93,3255.07) 3694.73,3230.27 cw(c3669.93,3255.07) 3669.93,3220 ; 3669.93,3220 cw(c3669.93,3184.93) 3694.73,3209.73 ccw(c3669.93,3184.93) 3669.93,3220 ; 3740.07,3220 ccw(c3740.07,3184.93) 3715.27,3209.73 cw(c3740.07,3184.93) 3740.07,3220 ; 3740.07,3220 cw(c3740.07,3255.07) 3715.27,3230.27 ccw(c3740.07,3255.07) 3740.07,3220 ; 3745.79,3220 ccw(c3745.79,3279.21) 3787.66,3237.34 cw(c3745.79,3279.21) 3745.79,3220 ; 3745.79,3220 cw(c3745.79,3160.79) 3787.66,3202.66 ccw(c3745.79,3160.79) 3745.79,3220 ; 3764.21,3220 ccw(c3764.21,3160.79) 3722.34,3202.66 cw(c3764.21,3160.79) 3764.21,3220 ; 3764.21,3220 cw(c3764.21,3279.21) 3722.34,3237.34 ccw(c3764.21,3279.21) 3764.21,3220 ; 3769.93,3220 ccw(c3769.93,3255.07) 3794.73,3230.27 cw(c3769.93,3255.07) 3769.93,3220 ; 3769.93,3220 cw(c3769.93,3184.93) 3794.73,3209.73 ccw(c3769.93,3184.93) 3769.93,3220 ; 3829.8,3195.2 ccw(c3805,3170.4) 3805,3205.47 cw(c3805,3170.4) 3829.8,3195.2 ; 3829.8,3195.2 cw(c3854.6,3220) 3819.53,3220 ccw(c3854.6,3220) 3829.8,3195.2 ; 3846.87,3178.13 ccw(c3805,3136.26) 3805,3195.47 cw(c3805,3136.26) 3846.87,3178.13 ; 3846.87,3178.13 cw(c3888.74,3220) 3829.53,3220 ccw(c3888.74,3220) 3846.87,3178.13 ; 4090.79,3175 ccw(c4090.79,3234.21) 4132.66,3192.34 cw(c4090.79,3234.21) 4090.79,3175 ; 4090.79,3175 cw(c4090.79,3115.79) 4132.66,3157.66 ccw(c4090.79,3115.79) 4090.79,3175 ; 4114.93,3175 ccw(c4114.93,3210.07) 4139.73,3185.27 cw(c4114.93,3210.07) 4114.93,3175 ; 4114.93,3175 cw(c4114.93,3139.93) 4139.73,3164.73 ccw(c4114.93,3139.93) 4114.93,3175
"I2S WS": P4.11 P4.12 P9.2 U1.33 U3.3 | length 3741.1
  Top Layer w10: U1.33@3190.02,2967.44 3236.56,2967.44 v1(3244,2960) ; 3221.15,2963.4 ccw(c3227.76,2974.86) v1@3237.52,2965.93 ; P9.2@4144.64,2973.9 ccw(c4182.3,2981.61) 4172.35,2944.48 ; P9.2@4150,2975 4315,2810 U3.3@4383.54,2810 ; P9.2@4151.1,2980.36 cw(c4143.39,2942.7) 4180.52,2952.65 ; 4174.8,2950.2 ccw(c4150,2925.4) 4150,2960.47 cw(c4150,2925.4) 4174.8,2950.2 ; 4174.8,2950.2 cw(c4199.6,2975) 4164.53,2975 ccw(c4199.6,2975) 4174.8,2950.2 ; 4191.87,2933.13 ccw(c4150,2891.26) 4150,2950.47 cw(c4150,2891.26) 4191.87,2933.13 ; 4191.87,2933.13 cw(c4233.74,2975) 4174.53,2975 ccw(c4233.74,2975) 4191.87,2933.13 ; 3204.85,2967.44 cw(c3204.85,2920.85) 3237.79,2953.79 ccw(c3204.85,2920.85) 3204.85,2967.44 ; 3228.99,2967.44 cw(c3228.99,2944.99) 3244.86,2960.86 ccw(c3228.99,2944.99) 3228.99,2967.44
  Bottom Layer w10: v1(3244,2960) 3665,2960 ; 3674.91,2944.74 ccw(c3714.67,2954) P4.12@3703.5,2914.74 ; 3680.26,2950.09 cw(c3671,2910.33) P4.12@3710.26,2921.5 ; P4.11@3799.64,2921.1 cw(c3837.3,2913.39) 3827.35,2950.52 ; P4.11@3806.1,2914.64 ccw(c3798.39,2952.3) 3835.52,2942.35 ; 4104.96,3011.6 cw(c4089.61,2954.3) P9.2@4145.72,2973.53 ; 4123.09,3006.74 cw(c4111.01,2961.64) P9.2@4155.18,2976.77 ; 4126.33,2995.87 cw(c4119.54,2970.5) P9.2@4145.52,2974.34 ; P9.2@4150,2975 4140,2975 4032.48,3082.52 3927.52,3082.52 3865,3020 3865,2980 P4.11@3805,2920 P4.12@3705,2920 3665,2960 ; 3265.2,2960 ccw(c3265.2,2938.8) 3250.21,2953.79 cw(c3265.2,2938.8) 3265.2,2960 ; 3265.2,2960 cw(c3265.2,2981.2) 3250.21,2966.21 ccw(c3265.2,2981.2) 3265.2,2960 ; 3665,2960 ccw(c3702.45,2997.45) 3704.19,2944.51 cw(c3702.45,2997.45) 3665,2960 ; 3665,2960 cw(c3627.55,2922.55) 3680.49,2920.81 ccw(c3627.55,2922.55) 3665,2960 ; 3681.31,2943.69 ccw(c3703.49,2965.87) 3704.52,2934.52 cw(c3703.49,2965.87) 3681.31,2943.69 ; 3681.31,2943.69 cw(c3659.13,2921.51) 3690.48,2920.48 ccw(c3659.13,2921.51) 3681.31,2943.69 ; 3740.07,2920 ccw(c3740.07,2884.93) 3715.27,2909.73 cw(c3740.07,2884.93) 3740.07,2920 ; 3740.07,2920 cw(c3740.07,2955.07) 3715.27,2930.27 ccw(c3740.07,2955.07) 3740.07,2920 ; 3745.79,2920 ccw(c3745.79,2979.21) 3787.66,2937.34 cw(c3745.79,2979.21) 3745.79,2920 ; 3745.79,2920 cw(c3745.79,2860.79) 3787.66,2902.66 ccw(c3745.79,2860.79) 3745.79,2920 ; 3764.21,2920 ccw(c3764.21,2860.79) 3722.34,2902.66 cw(c3764.21,2860.79) 3764.21,2920 ; 3764.21,2920 cw(c3764.21,2979.21) 3722.34,2937.34 ccw(c3764.21,2979.21) 3764.21,2920 ; 3769.93,2920 ccw(c3769.93,2955.07) 3794.73,2930.27 cw(c3769.93,2955.07) 3769.93,2920 ; 3769.93,2920 cw(c3769.93,2884.93) 3794.73,2909.73 ccw(c3769.93,2884.93) 3769.93,2920 ; 3829.8,2944.8 ccw(c3854.6,2920) 3819.53,2920 cw(c3854.6,2920) 3829.8,2944.8 ; 3829.8,2944.8 cw(c3805,2969.6) 3805,2934.53 ccw(c3805,2969.6) 3829.8,2944.8 ; 3846.87,2961.87 ccw(c3888.74,2920) 3829.53,2920 cw(c3888.74,2920) 3846.87,2961.87 ; 3846.87,2961.87 cw(c3805,3003.74) 3805,2944.53 ccw(c3805,3003.74) 3846.87,2961.87 ; 4091.06,3023.94 ccw(c4150,3082.88) 4150,2999.53 cw(c4150,3082.88) 4091.06,3023.94 ; 4108.13,3006.87 ccw(c4150,3048.74) 4150,2989.53 cw(c4150,3048.74) 4108.13,3006.87 ; 4115.2,2999.8 cw(c4090.4,2975) 4125.47,2975 ccw(c4090.4,2975) 4115.2,2999.8
LED1: LED1.2 P4.7 P4.8 U1.29 | length 4686.6
  Top Layer w10: LED1.2@2520,1715.43 2520,1900 v1(2645,2025) ; 2633.77,2015.85 cw(c2647.64,2012.13) v1@2644.76,2026.2 ; 2635.85,2013.77 ccw(c2632.13,2027.64) v1@2646.2,2024.76 ; U1.29@3148.26,2828.24 3149.67,2825.13 3170.57,2804.23 ; v1(3180,2025) 3320,2025 3368,2073 3368,2705 3278,2795 3265,2795 3255,2795 3245.77,2804.23 ; 2520,1760.39 ccw(c2564.96,1760.39) 2533.17,1728.6 cw(c2564.96,1760.39) 2520,1760.39 ; 2520,1760.39 cw(c2475.04,1760.39) 2506.83,1728.6 ccw(c2475.04,1760.39) 2520,1760.39 ; 2630.01,2010.01 ccw(c2615.02,2025) 2636.22,2025 cw(c2615.02,2025) 2630.01,2010.01 ; 2630.01,2010.01 cw(c2645,1995.02) 2645,2016.22 ccw(c2645,1995.02) 2630.01,2010.01 ; 3170.57,2804.23 3245.77,2804.23 ; 3170.57,2804.23 3245.77,2804.23 ; 3178.6,2804.23 cw(c3178.6,2768.6) v1@3203.79,2793.79 ; 3178.6,2804.23 cw(c3178.6,2768.6) v1@3203.79,2793.79 ; 3178.6,2804.23 cw(c3178.6,2768.6) v1@3203.79,2793.79 ; 3178.6,2804.23 cw(c3178.6,2768.6) v1@3203.79,2793.79 ; 3201.2,2025 ccw(c3201.2,2003.8) 3186.21,2018.79 cw(c3201.2,2003.8) 3201.2,2025 ; 3201.2,2025 cw(c3201.2,2046.2) 3186.21,2031.21 ccw(c3201.2,2046.2) 3201.2,2025 ; v1@3216.21,2793.79 cw(c3241.4,2768.6) 3241.4,2804.23 ; v1@3216.21,2793.79 cw(c3241.4,2768.6) 3241.4,2804.23 ; v1@3216.21,2793.79 cw(c3241.4,2768.6) 3241.4,2804.23 ; v1@3216.21,2793.79 cw(c3241.4,2768.6) 3241.4,2804.23
  Bottom Layer w10: v1(2645,2025) v1(3180,2025) ; v1@3202,2804 3213,2815 3273,2815 3273,2800 3283,2790 3635,2790 P4.8@3705,2720 P4.7@3805,2720 ; v1@3209.53,2798.87 ccw(c3217.11,2817.01) 3226.94,2799.99 ; v1@3212.27,2808.48 ccw(c3216.72,2825.07) 3225.3,2810.2 ; v1@3213.39,2808.1 ccw(c3226.9,2840.43) 3244.43,2810.08 ; v1@3218.48,2797.73 cw(c3242.84,2791.2) 3230.23,2813.04 ; 3674.48,2742.35 ccw(c3711.61,2752.3) P4.8@3703.9,2714.64 ; 3682.65,2750.52 cw(c3672.7,2713.39) P4.8@3710.36,2721.1 ; 2666.2,2025 ccw(c2666.2,2003.8) 2651.21,2018.79 cw(c2666.2,2003.8) 2666.2,2025 ; 2666.2,2025 cw(c2666.2,2046.2) 2651.21,2031.21 ccw(c2666.2,2046.2) 2666.2,2025 ; 3158.8,2025 ccw(c3158.8,2046.2) 3173.79,2031.21 cw(c3158.8,2046.2) 3158.8,2025 ; 3158.8,2025 cw(c3158.8,2003.8) 3173.79,2018.79 ccw(c3158.8,2003.8) 3158.8,2025 ; 3663.13,2761.87 ccw(c3705,2803.74) 3705,2744.53 cw(c3705,2803.74) 3663.13,2761.87 ; 3663.13,2761.87 cw(c3621.26,2720) 3680.47,2720 ccw(c3621.26,2720) 3663.13,2761.87 ; 3680.2,2744.8 ccw(c3705,2769.6) 3705,2734.53 cw(c3705,2769.6) 3680.2,2744.8 ; 3680.2,2744.8 cw(c3655.4,2720) 3690.47,2720 ccw(c3655.4,2720) 3680.2,2744.8 ; 3740.07,2720 ccw(c3740.07,2684.93) 3715.27,2709.73 cw(c3740.07,2684.93) 3740.07,2720 ; 3740.07,2720 cw(c3740.07,2755.07) 3715.27,2730.27 ccw(c3740.07,2755.07) 3740.07,2720 ; 3745.79,2720 ccw(c3745.79,2779.21) 3787.66,2737.34 cw(c3745.79,2779.21) 3745.79,2720 ; 3745.79,2720 cw(c3745.79,2660.79) 3787.66,2702.66 ccw(c3745.79,2660.79) 3745.79,2720 ; 3764.21,2720 ccw(c3764.21,2660.79) 3722.34,2702.66 cw(c3764.21,2660.79) 3764.21,2720 ; 3764.21,2720 cw(c3764.21,2779.21) 3722.34,2737.34 ccw(c3764.21,2779.21) 3764.21,2720 ; 3769.93,2720 ccw(c3769.93,2755.07) 3794.73,2730.27 cw(c3769.93,2755.07) 3769.93,2720 ; 3769.93,2720 cw(c3769.93,2684.93) 3794.73,2709.73 ccw(c3769.93,2684.93) 3769.93,2720 ; v1@3202.07,2807.93 cw(c3219.12,2790.88) 3219.12,2815 ccw(c3219.12,2790.88) v1@3202.07,2807.93 ; v1@3209.14,2800.86 cw(c3243.27,2766.73) 3243.27,2815 ccw(c3243.27,2766.73) v1@3209.14,2800.86 ; v1@3216.21,2793.79 cw(c3267.41,2742.59) 3267.41,2815 ccw(c3267.41,2742.59) v1@3216.21,2793.79
  other v1: 3210,2800
LED2: LED2.2 P4.9 P4.10 U1.30 | length 4614.7
  Top Layer w6: U1.30@3157.65,2842.16 U1.30@3162.18,2842.16
  Top Layer w10: LED2.2@2630,1710.43 2630,1935 v1(2670,1975) ; 2658.77,1965.85 cw(c2672.64,1962.13) v1@2669.76,1976.2 ; 2660.85,1963.77 ccw(c2657.13,1977.64) v1@2671.2,1974.76 ; U1.30@3162.18,2842.16 3162.18,2843.86 3138.16,2867.88 3138.16,2890.03 3156.07,2907.94 3287.06,2907.94 v1(3289,2906) ; v1@3185,1975 3320,1975 3395,2050 v1@3395,2260 ; P4.10@3705,2820 3670.37,2820 ; 2630,1755.39 ccw(c2674.96,1755.39) 2643.17,1723.6 cw(c2674.96,1755.39) 2630,1755.39 ; 2630,1755.39 cw(c2585.04,1755.39) 2616.83,1723.6 ccw(c2585.04,1755.39) 2630,1755.39 ; 2655.01,1960.01 ccw(c2640.02,1975) 2661.22,1975 cw(c2640.02,1975) 2655.01,1960.01 ; 2655.01,1960.01 cw(c2670,1945.02) 2670,1966.22 ccw(c2670,1945.02) 2655.01,1960.01 ; 3201.2,1975 ccw(c3201.2,1953.8) 3186.21,1968.79 cw(c3201.2,1953.8) 3201.2,1975 ; 3201.2,1975 cw(c3201.2,1996.2) 3186.21,1981.21 ccw(c3201.2,1996.2) 3201.2,1975 ; 3395,2248.8 ccw(c3373.8,2248.8) 3388.79,2263.79 cw(c3373.8,2248.8) 3395,2248.8 ; 3395,2248.8 cw(c3416.2,2248.8) 3401.21,2263.79 ccw(c3416.2,2248.8) 3395,2248.8 ; v1@3605,2465 3595,2455 v1@3605,2465 ; v1@3605,2465 3605,2654.96 3575.6,2684.36 3575.6,2725.23 3670.37,2820 ; 3670.37,2820 ccw(c3670.37,2832.18) 3681.86,2828.14 cw(c3670.37,2832.18) 3670.37,2820 ; 3670.37,2820 cw(c3670.37,2807.82) 3681.86,2811.86 ccw(c3670.37,2807.82) 3670.37,2820 ; 3263.13,2907.94 cw(c3263.13,2880.13) 3282.79,2899.79 ccw(c3263.13,2880.13) 3263.13,2907.94 ; 3272.48,2907.94 ccw(c3272.48,2922.52) 3282.79,2912.21 cw(c3272.48,2922.52) 3272.48,2907.94 ; v1@3593.79,2461.21 ccw(c3566.73,2488.27) 3605,2488.27 cw(c3566.73,2488.27) v1@3593.79,2461.21
  Bottom Layer w10: v1(2670,1975) v1(3180,1975) ; v1(3289,2906) 3375,2820 P4.10@3705,2820 P4.9@3805,2820 ; v1(3395,2270) 3395,2385 3465,2455 v1(3600,2455) ; 2691.2,1975 ccw(c2691.2,1953.8) 2676.21,1968.79 cw(c2691.2,1953.8) 2691.2,1975 ; 2691.2,1975 cw(c2691.2,1996.2) 2676.21,1981.21 ccw(c2691.2,1996.2) 2691.2,1975 ; 3158.8,1975 ccw(c3158.8,1996.2) 3173.79,1981.21 cw(c3158.8,1996.2) 3158.8,1975 ; 3158.8,1975 cw(c3158.8,1953.8) 3173.79,1968.79 ccw(c3158.8,1953.8) 3158.8,1975 ; 3303.99,2891.01 ccw(c3289,2876.02) 3289,2897.22 cw(c3289,2876.02) 3303.99,2891.01 ; 3303.99,2891.01 cw(c3318.98,2906) 3297.78,2906 ccw(c3318.98,2906) 3303.99,2891.01 ; 3395,2291.2 ccw(c3416.2,2291.2) 3401.21,2276.21 cw(c3416.2,2291.2) 3395,2291.2 ; 3395,2291.2 cw(c3373.8,2291.2) 3388.79,2276.21 ccw(c3373.8,2291.2) 3395,2291.2 ; 3578.8,2455 ccw(c3578.8,2476.2) 3593.79,2461.21 cw(c3578.8,2476.2) 3578.8,2455 ; 3578.8,2455 cw(c3578.8,2433.8) 3593.79,2448.79 ccw(c3578.8,2433.8) 3578.8,2455 ; 3645.79,2820 ccw(c3645.79,2879.21) 3687.66,2837.34 cw(c3645.79,2879.21) 3645.79,2820 ; 3645.79,2820 cw(c3645.79,2760.79) 3687.66,2802.66 ccw(c3645.79,2760.79) 3645.79,2820 ; 3669.93,2820 ccw(c3669.93,2855.07) 3694.73,2830.27 cw(c3669.93,2855.07) 3669.93,2820 ; 3669.93,2820 cw(c3669.93,2784.93) 3694.73,2809.73 ccw(c3669.93,2784.93) 3669.93,2820 ; 3740.07,2820 ccw(c3740.07,2784.93) 3715.27,2809.73 cw(c3740.07,2784.93) 3740.07,2820 ; 3740.07,2820 cw(c3740.07,2855.07) 3715.27,2830.27 ccw(c3740.07,2855.07) 3740.07,2820 ; 3745.79,2820 ccw(c3745.79,2879.21) 3787.66,2837.34 cw(c3745.79,2879.21) 3745.79,2820 ; 3745.79,2820 cw(c3745.79,2760.79) 3787.66,2802.66 ccw(c3745.79,2760.79) 3745.79,2820 ; 3764.21,2820 ccw(c3764.21,2760.79) 3722.34,2802.66 cw(c3764.21,2760.79) 3764.21,2820 ; 3764.21,2820 cw(c3764.21,2879.21) 3722.34,2837.34 ccw(c3764.21,2879.21) 3764.21,2820 ; 3769.93,2820 ccw(c3769.93,2855.07) 3794.73,2830.27 cw(c3769.93,2855.07) 3769.93,2820 ; 3769.93,2820 cw(c3769.93,2784.93) 3794.73,2809.73 ccw(c3769.93,2784.93) 3769.93,2820